# Altium PCB PCB1.PcbDoc (part 3 of 7)
Units mm, origin at the board's own origin, x right, y up, seen from the top; angles counter-clockwise.
Board outline 100 x 100 mm, 6 copper layers (Top, GND_1, Signal, PWR, GND_2, Bottom), stack 0.816 mm thick; 321 components, 260 nets, 1718 pads, 694 vias.
Unrouted connection lines stored in the file: 527.
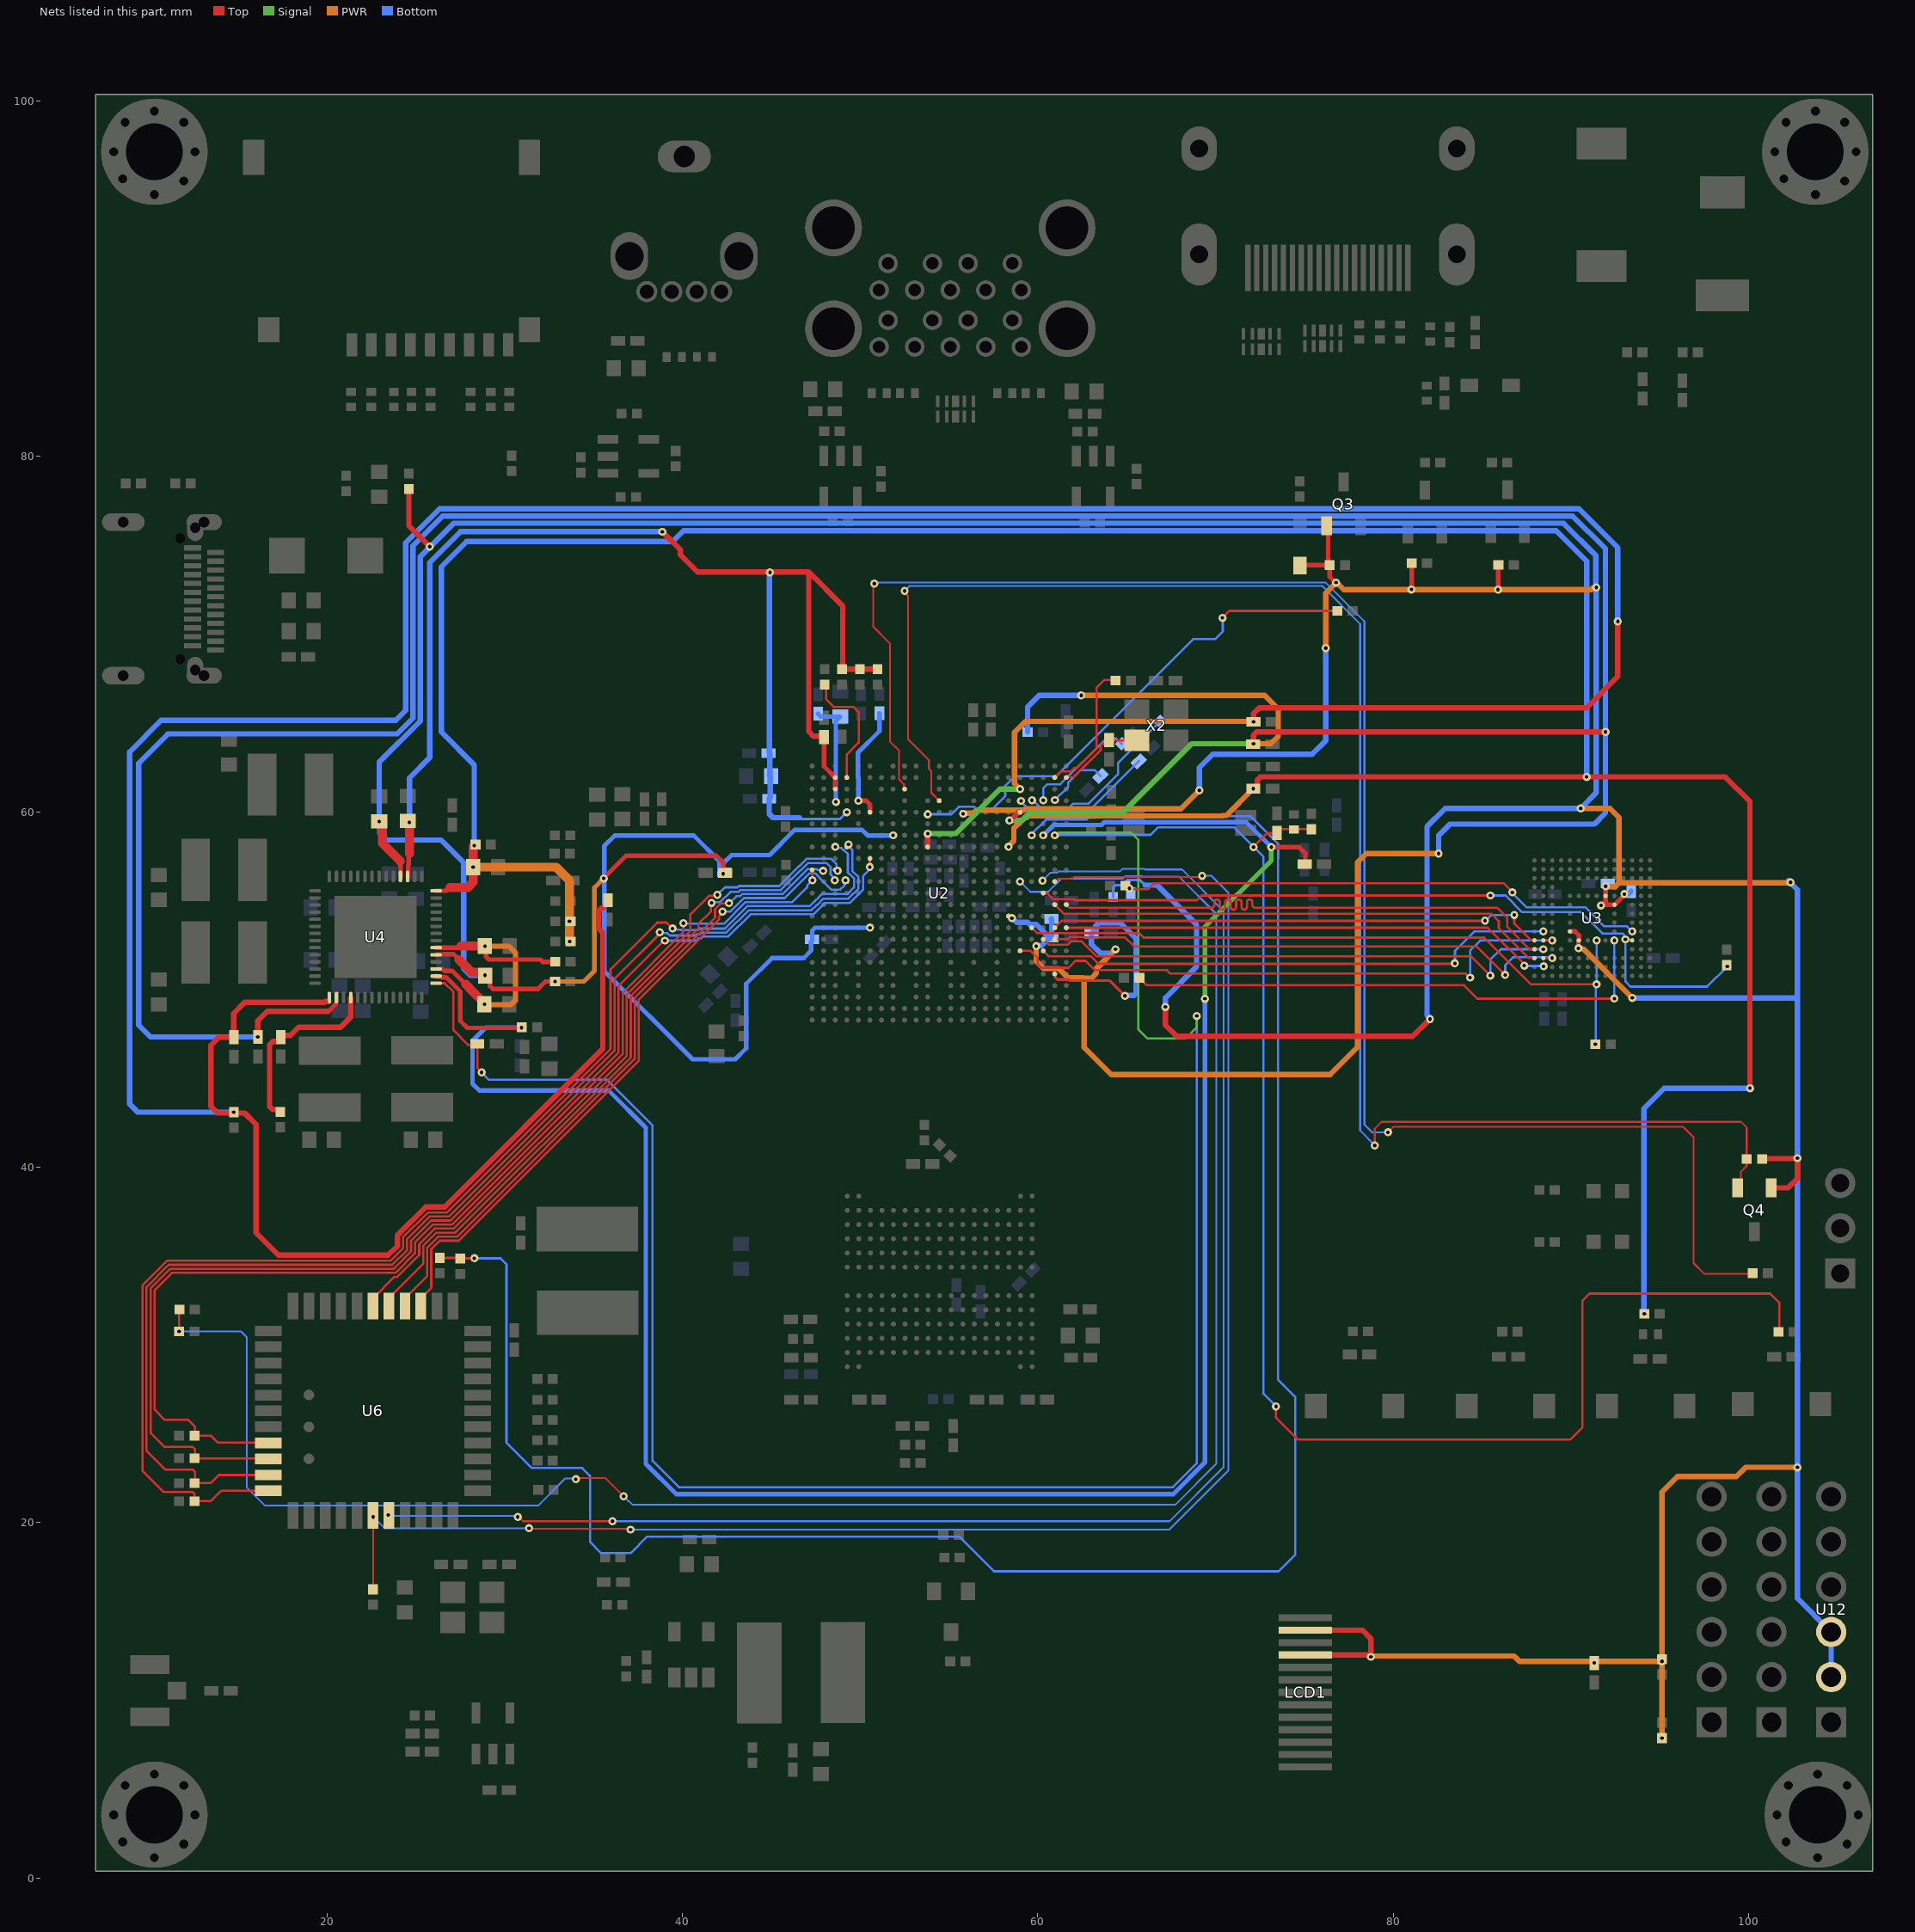
[diagram p6: the nets of this part, all layers, seen from the top]

## Via types
v1: diameter 0.457, hole 0.203, Top to Bottom, tented both sides, 685 vias
v2: diameter 0.61, hole 0.305, Top to Bottom, tented both sides, 9 vias

## Nets (pads, with @x,y where several pads share a name; then routed paths per layer and width w, separated by ;. In a path a pad name is that pad's centre, name@x,y a point inside that pad or via, vN(x,y) a via of type N, cw(c..) or ccw(c..) an arc to the next point about the centre after c; other vN are vias at no path point) (continued)
EMMC_D5: U2.T21 U3.B4 | length 30.3
  Top w0.127: U2.T21@60.303,52.832 60.606,52.528 61.695,52.528 61.893,52.727 62.456,52.727 63.317,51.867 71.779,51.867 75.971,51.867 84.389,51.867 v1(85.464,50.792)
  Bottom w0.127: v1(85.464,50.792) 85.464,51.682 86.053,52.271 v1(88.45,52.271)
EMMC_D6: U2.U19 U3.B5 U3.C5 | length 33.4
  Top w0.127: U2.U19@59.003,52.182 59.583,52.182 59.985,51.78 59.985,51.42 60.177,51.228 61.729,51.228 61.907,51.406 61.907,51.409 62.117,51.62 62.691,51.62 63.214,51.096 67.268,51.096 67.463,50.901 70.597,50.901 72.771,50.901 84.089,50.901 84.317,50.673 v1(84.328,50.673) ; U3.B5@88.45,52.771 v1(88.95,52.771)
  Bottom w0.127: v1(84.328,50.673) 84.328,52.197 84.897,52.766 88.945,52.766 v1(88.95,52.771)
EMMC_D7: U2.U21 U3.B6 | length 29.6
  Top w0.127: U2.U21@60.303,52.182 60.606,51.879 62.984,51.879 63.414,51.449 76.392,51.449 80.9,51.449 83.446,51.449 v1(83.473,51.475)
  Bottom w0.127: v1(83.473,51.475) 83.473,52.185 84.558,53.271 v1(88.45,53.271)
EMMC_DS: R38.2 U2.R20 U3.H5 | length 39
  Top w0.127: U2.R20@59.653,53.482 59.956,53.178 61.703,53.178 61.705,53.181 65.691,53.181 65.95,52.922 85.124,52.922 87.754,50.292 v1(91.44,50.292)
  Bottom w0.127: v1(91.374,46.931) 91.407,46.964 91.407,50.259 v1(91.44,50.292) 91.445,50.297 91.445,52.766 v1(91.45,52.771)
EMMC_RST: R36.1 U3.K5 | length 30.5
  Top w0.127: R36.1@65.713,50.663 66.132,50.244 73.787,50.244 75.819,50.244 83.989,50.244 84.742,49.491 v1(92.445,49.491)
  Bottom w0.127: v1(92.445,49.491) 92.435,49.5 92.435,52.756 v1(92.45,52.771)
EPHY_RTX: R76.2 U2.B4 | length 6.9
  Top w0.127: R76.2@48.086,67.134 48.086,66.341 48.514,65.913 49.616,65.913 49.927,65.602 49.927,63.91 49.253,63.236 U2.B4@49.253,61.932